# Altium PCB BuckLedDriver.PcbDoc
Units mm, origin at the board's own origin, x right, y up, seen from the top; angles counter-clockwise.
Board outline 21 x 16 mm, 2 copper layers (Top Layer, Bottom Layer); 22 components, 10 nets, 48 pads, 107 vias.
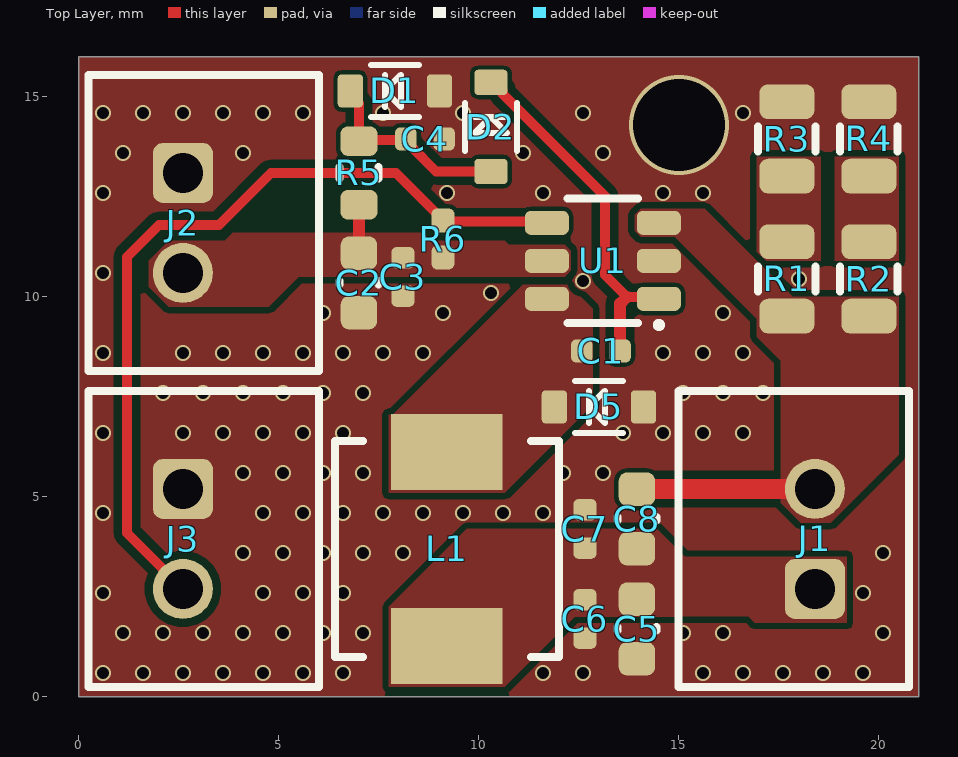
[diagram p0: Top Layer view]
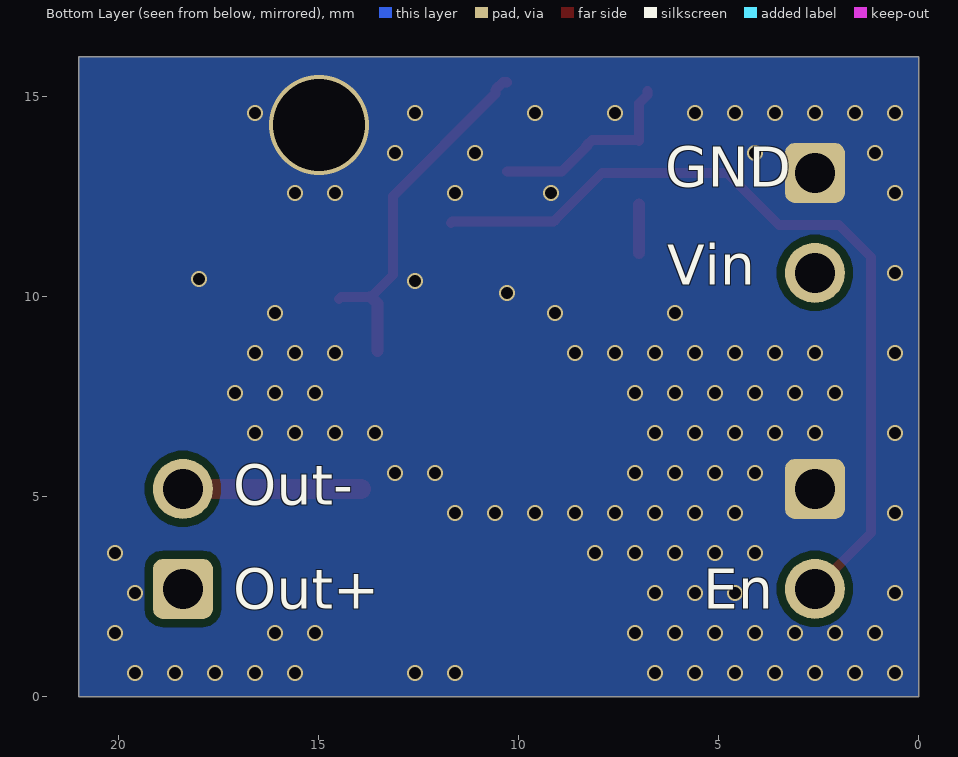
[diagram p1: Bottom Layer view, seen from below]
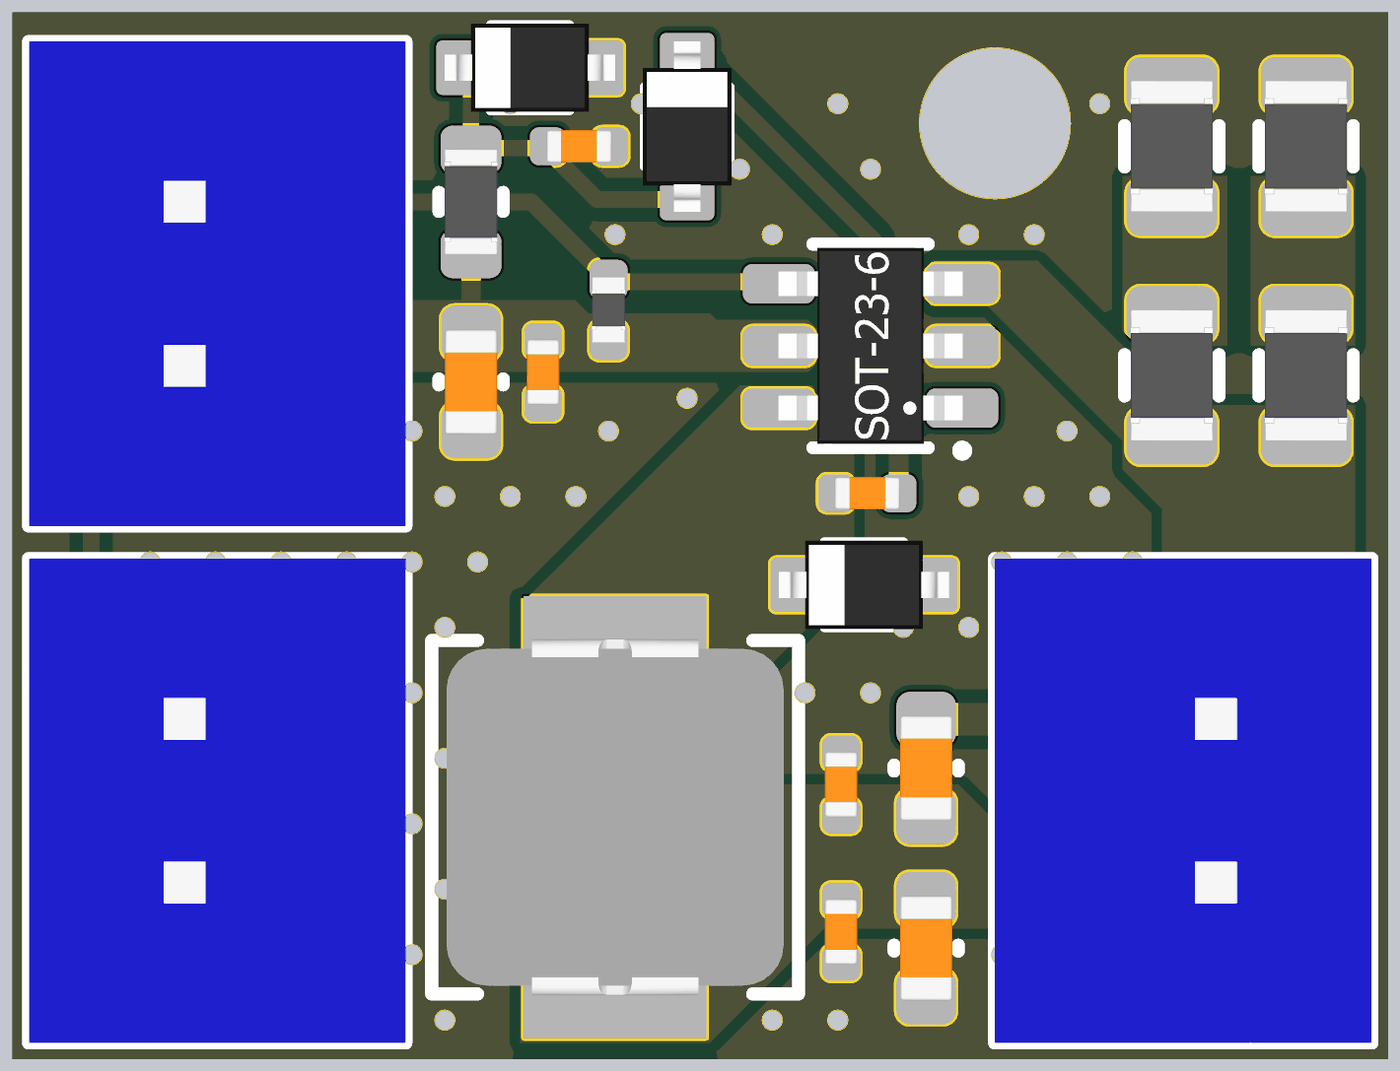
[diagram p2: 3D render of the assembled board from above, using the file's embedded part models]

## Layer stack, top to bottom
Top Solder: solder mask 0.0102, Solder Resist, Dk 3.5
Top Layer: signal copper 0.0356
Dielectric 1: dielectric 0.32, FR-4, Dk 4.8
Bottom Layer: signal copper 0.0356
Bottom Solder: solder mask 0.0102, Solder Resist, Dk 3.5

## Board outline
0,0 21,0 21,16 0,16

## Design rules (kind name [scope] priority, off if disabled: settings)
Clearance Clearance_1 [All] p1: gap=0.2 ignorepadtopadclearanceinfootprint=FALSE except(0: Arc-Hole Track-Hole SMDPad-Hole THPad-Hole Via-Hole Fill-Hole Poly-Hole Region-Hole Text-Hole; 0.1: Arc-Arc Arc-Track Arc-SMDPad Arc-THPad Track-Track Track-SMDPad Track-THPad SMDPad-Fill SMDPad-Poly SMDPad-Region; 0.12: SMDPad-SMDPad; 0.15: SMDPad-Via Fill-Fill Fill-Poly Fill-Region Poly-Poly Poly-Region Region-Region; 0.254: Arc-Text Track-Text SMDPad-THPad SMDPad-Text THPad-THPad THPad-Text Via-Text Fill-Text Poly-Text Region-Text Text-Text)
HoleSize [All] p1: absolutevalues=TRUE maxlimit=5 minlimit=0.025 maxpercent=80.000 minpercent=20.000
HoleToHoleClearance PadHoleClearance [IsPad] p1: gap=0.45 allowstackedmicrovias=TRUE
HoleToHoleClearance ViaHoleToHoleClearance [IsVia] p2: gap=0.2 allowstackedmicrovias=TRUE
MinimumSolderMaskSliver [All] p1: minsoldermaskwidth=0.13
PlaneClearance PlaneClearance_GNSS_RF [InNetClass('GNSS_RF')] p1: clearance=0.5
PlaneClearance [All] p2: clearance=0.2
PlaneConnect [All] p1: planeconnectstyle=Direct reliefexpansion=0.508 reliefentries=4 reliefconductorwidth=0.254 reliefairgap=0.254
PolygonConnect [All] p1: connectstyle=Direct reliefconductorwidth=0.254 reliefentries=4 polygonreliefangle="90 Angle" airgapwidth=0.254
RoutingCorners GNSS_RF_Corner [InNetClass('GNSS_RF')] p1: cornerstyle=Round minsetback=2.54 maxsetback=2.54
RoutingCorners GSM_RF_Corner [InNetClass('GSM_RF')] p2: cornerstyle=Round minsetback=2.54 maxsetback=2.54
RoutingCorners [All] p3: cornerstyle=Round minsetback=2.54 maxsetback=2.54
RoutingVias [All] p1: holewidth=0.25 width=0.35 viastyle="Through Hole" minholewidth=0.15 minwidth=0.25 maxholewidth=6.3 maxwidth=6.3
SilkToSilkClearance [All] p1: silktosilkclearance=0.15
SilkToSolderMaskClearance [IsPad] p1: minsilkscreentomaskgap=0.15 clearancetoexposedcopper=TRUE
SolderMaskExpansion [All] p1: expansion=0.038 istentingtop=FALSE
Width GNSS_RF [InNetClass('GNSS_RF')] p1: maxlimit=0.362 minlimit=0.361 preferedwidth=0.362 impedanceprofiledriven=TRUE impedanceprofileid={B57A2AE8-FEE7-4E6A-B57C-85C40F5AC8AD} minimp=50.000000 maximp=50.000000 favimp=50.000000
Width GSM_RF [InNetClass('GSM_RF')] p2: maxlimit=0.362 minlimit=0.361 preferedwidth=0.362 impedanceprofiledriven=TRUE impedanceprofileid={A0FC02F2-C9C1-43A3-96B0-B97EB0968512} minimp=50.000000 maximp=50.000000 favimp=50.000000
Width [All] p3: maxlimit=1 minlimit=0.1 preferedwidth=0.1 minimp=50.000000 maximp=50.000000 favimp=50.000000
22 further rules are at their usual default settings.

## Components (designator, comment, footprint, x,y, rotation, side; value= is the part's Value field where it differs from the comment)
C1 "10n" C0402_N 13.05,8.65 r180 top
C2 "10u" C0603_N 7,10.35 r90 top
C3 "100n" C0402_N 8.1,10.5 r90 top
C4 "100n" C0402_N 8.65,13.95 r180 top
C5 "10u" C0603_N 13.95,1.7 r90 top
C6 "1u" C0402_N 12.65,1.95 r90 top
C7 "100n" C0402_N 12.65,4.2 r270 top
C8 "1u" C0603_N 13.95,4.45 r270 top
D1 "4,7V" SOD-323 7.9,15.15 r0 top
D2 "DIODE" SOD-323 10.3,14.25 r270 top
D5 "DIODE" SOD-323 13,7.25 r0 top
J1 "" B2B-XH-A 18.4,2.7 r90 top
J2 "" B2B-XH-A 2.6,13.1 r270 top
J3 "" B2B-XH-A 2.6,5.2 r270 top
L1 "IND" IHLP2020 9.2,3.7 r270 top
R1 "RES" R0805_N 17.7,10.45 r90 top
R2 "RES" R0805_N 19.75,10.45 r90 top
R3 "RES" R0805_N 17.7,13.95 r90 top
R4 "RES" R0805_N 19.75,13.95 r90 top
R5 "2k" R0603_N 7,13.1 r90 top
R6 "RES" R0402_N 9.1,11.45 r90 top
U1 "LM3405" SOT23-6 13.1,10.9 r90 top

## Footprints (in the part's own frame and the unit in brackets; to place one, negate y for a bottom-side part, rotate by r counter-clockwise, add the part's x,y. Pads: shape width x height; smd on the part's side, far side on the other; paste and mask are expansions set on the pad)
B2B-XH-A [mm] "Header, Vertical, 2.50 mm pitch; 0.70 mm lead width, 5 pins, 1 row, 5 pins per row, 14.90 mm L X 5.75 mm W X 7.00 mm H body"
  rrect33% 1.5x1.5 / inner round 1.5 / far side rrect33% 1.5x1.5 hole 1 paste-1.5: 1(0,0)
  round 1.5 hole 1 paste-1.5: 2(2.5,0)
  silkscreen extent -2.45,-2.35 4.95,3.4, body extent -2.45,-2.35 4.95,3.4, height 7.05
C0402_N [mm] "Capacitor, Chip; 1.00 mm L X 0.50 mm W X 0.55 mm H body"
  rrect52% 0.54x0.58 smd: 1(-0.48,0) 2(0.48,0)
  body extent -0.5,-0.25 0.5,0.25, height 0.55
C0603_N [mm] "Capacitor, Chip; 1.60 mm L X 0.80 mm W X 0.87 mm H body"
  rrect50% 0.84x0.91 smd: 1(-0.745,0) 2(0.745,0)
  silkscreen extent -0.05,-0.49 0.05,0.49, body extent -0.8,-0.4 0.8,0.4, height 0.87
IHLP2020 [mm] "Inductor, 5.18mm L X 5.18mm W X 3 mm H body"
  rect 1.905x2.79 smd: 1(-2.425,0) 2(2.425,0)
  silkscreen extent -2.7,-2.8 2.7,2.8, body extent -2.73,-2.57 2.73,2.57, height 2.84
R0402_N [mm] "Resistor, Chip; 1.00 mm L X 0.50 mm W X 0.40 mm H body"
  rrect52% 0.6x0.58 smd: 1(-0.465,0) 2(0.465,0)
  body extent -0.5,-0.25 0.5,0.25, height 0.4
R0603_N [mm] "Resistor, Chip; 1.60 mm L X 0.80 mm W X 0.55 mm H body"
  rrect51% 0.74x0.93 smd: 1(-0.795,0) 2(0.795,0)
  silkscreen extent -0.15,-0.49 0.15,0.49, body extent -0.8,-0.4 0.8,0.4, height 0.55
R0805_N [mm] "Resistor, Chip; 2.00 mm L X 1.25 mm W X 0.60 mm H body"
  rrect51% 0.87x1.38 smd: 1(-0.93,0) 2(0.93,0)
  silkscreen extent -0.32,-0.72 0.32,0.72, body extent -1,-0.63 1,0.63, height 0.6
SOD-323 [mm] "SOD-323"
  rrect30% 0.63x0.83 smd: A(1.115,0) C(-1.115,0)
  silkscreen extent -0.6,-0.65 0.6,0.65, body extent -1.3,-0.67 1.3,0.68, height 1.1
SOT23-6 [mm] "Small Outline Transistor (SOT23), 0.95 mm pitch; 6 pin"
  rrect49% 0.6x1.1 smd: 1(-0.95,-1.4) 2(0,-1.4) 3(0.95,-1.4) 4(0.95,1.4) 5(0,1.4) 6(-0.95,1.4)
  silkscreen extent -1.68,-1.48 1.56,0.88, body extent -1.5,-1.4 1.5,1.4, height 0.86

## Part data
C1 C2 C3 C4 C5 C6 C7 C8: library part CAP, RevS="$Rev:: 58        $"
D1: library part DIODE_ZENER
J1 J2 J3: library part PINHDR_2X1, "Socket", ComponentLink1Description=Manufacturer, ComponentLink1URL=http://www.we-online.de, ComponentLink2Description=Datasheet, ComponentLink2URL=http://katalog.we-online.de/em/datasheet/691412320002.pdf
L1: "Inductor"
R5: library part RES
U1: "1.6-MHz, 1-A Constant Current Buck LED Driver"

## Via types
v1: diameter 0.4, hole 0.3, Top Layer to Bottom Layer, tented both sides, 106 vias
v2: diameter 2.5, hole 2.3, Top Layer to Bottom Layer, tented both sides, 1 vias

## Nets (pads, with @x,y where several pads share a name; then routed paths per layer and width w, separated by ;. In a path a pad name is that pad's centre, name@x,y a point inside that pad or via, vN(x,y) a via of type N, cw(c..) or ccw(c..) an arc to the next point about the centre after c; other vN are vias at no path point)
EN: J3.2 R6.2 U1.4 | length 20.8
  Top Layer w0.254: J3.2 1.2,4.1 1.2,11 2,11.8 3.5,11.8 4.8,13.1 7.925,13.1 9.1,11.925 R6.2 9.132,11.883 11.668,11.883 U1.4
GND: C2.1 C3.1 C4.1 C5.1 C6.1 C7.1 D1.A D5.A J2.1 J3.1 R3.2 R4.2 U1.2
  other v1: 0.6,0.6 1.6,0.6 2.6,0.6 3.6,0.6 4.6,0.6 5.6,0.6 6.6,0.6 11.6,0.6 12.6,0.6 15.6,0.6 16.6,0.6 17.6,0.6 18.6,0.6 19.6,0.6 1.1,1.6 2.1,1.6 3.1,1.6 4.1,1.6 5.1,1.6 6.1,1.6 7.1,1.6 15.1,1.6 16.1,1.6 20.1,1.6 0.6,2.6 4.6,2.6 5.6,2.6 6.6,2.6 19.6,2.6 4.1,3.6 5.1,3.6 6.1,3.6 7.1,3.6 8.1,3.6 20.1,3.6 0.6,4.6 4.6,4.6 5.6,4.6 6.6,4.6 7.6,4.6 8.6,4.6 9.6,4.6 10.6,4.6 11.6,4.6 4.1,5.6 5.1,5.6 6.1,5.6 7.1,5.6 12.1,5.6 13.1,5.6 0.6,6.6 2.6,6.6 3.6,6.6 4.6,6.6 5.6,6.6 6.6,6.6 13.6,6.6 14.6,6.6 15.6,6.6 16.6,6.6 2.1,7.6 3.1,7.6 4.1,7.6 5.1,7.6 6.1,7.6 7.1,7.6 15.1,7.6 16.1,7.6 17.1,7.6 0.6,8.6 2.6,8.6 3.6,8.6 4.6,8.6 5.6,8.6 6.6,8.6 7.6,8.6 8.6,8.6 14.6,8.6 15.6,8.6 16.6,8.6 6.1,9.6 9.1,9.6 16.1,9.6 10.3,10.1 12.6,10.4 18,10.45 0.6,10.6 0.6,12.6 9.2,12.6 11.6,12.6 14.6,12.6 15.6,12.6 1.1,13.6 4.1,13.6 11.1,13.6 13.1,13.6 0.6,14.6 1.6,14.6 2.6,14.6 3.6,14.6 4.6,14.6 5.6,14.6 7.6,14.6 9.6,14.6 12.6,14.6 16.6,14.6
  other v2: 15,14.3
NetC1_1: C1.1 D2.C U1.1 | length 9.1
  Top Layer w0.254: D2.C 10.4,15.365 10.588,15.177 10.588,15.077 13.15,12.515 13.15,10.55 13.7,10 14.45,10 U1.1
  Top Layer w0.3: C1.1 13.53,9.83 13.7,10
NetC1_2: C1.2 D5.C L1.1 U1.6
NetC4_2: C4.2 D1.C D2.A R5.2 | length 5
  Top Layer w0.254: D1.C 6.785,15.05 7,14.835 R5.2 7.028,13.922 8.17,13.922 8.305,13.788 8.305,13.759 8.928,13.135 D2.A
NetR1_2: R1.2 R3.1
NetR2_2: R2.2 R4.1
Out+: C5.2 C6.2 C7.2 C8.2 J1.1 L1.2
Out-: C8.1 J1.2 R1.1 R2.1 U1.3 | length 4.5
  Top Layer w0.5: C8.1 13.952,5.198 18.397,5.198 J1.2
Vin: C2.2 C3.2 J2.2 R5.1 R6.1 U1.5 | length 1.2
  Top Layer w0.3: C2.2 R5.1

## Polygon pours and split planes (outlines as drawn)
Out- on Top Layer "OUT-_L01_P001" (solid, pour order 1): 13.9,11.65 14.05,11.5 14.9,11.5 16.95,9.45 16.95,9.007 17.55,8.407 17.55,4.85 18.05,4.35 18.8,4.35 19.25,4.8 20.5,6.05 20.5,10 17.85,10 15.65,12.2 14.05,12.2 13.9,12.05
GND on Top Layer "GND_L01_P006" (solid, remove dead copper, pour order 6): 21,16 21,0 0,0 0,16
Out+ on Top Layer "OUT+_L01_P005" (solid, pour order 5): 7.75,0.25 10.65,0.25 12.4,2 16.75,2 16.9,1.85 19.2,1.85 19.2,3.5 15.15,3.5 14.45,4.2 9.7,4.2 7.75,2.25
NetC1_2 on Top Layer "NETC1_2_L01_P004" (solid, pour order 4): 11.1,10.3 12.25,10.3 12.85,9.7 12.85,7.3 10.65,5.1 7.75,5.1 7.75,7.05 7.85,7.05
NetR2_2 on Top Layer "NETR2_2_L01_P003" (solid, pour order 3): 20.5,13.5 20.5,10.9 18.9,10.9 18.9,13.5
NetR1_2 on Top Layer "NETR1_2_L01_P002" (solid, pour order 2): 16.95,13.5 18.55,13.5 18.55,10.9 16.95,10.9
Vin on Top Layer "VIN_L01_P000" (solid, pour order 0): 2.25,11.4 1.75,10.9 1.75,10.25 2.25,9.75 4.75,9.75 5.5,10.5 12.15,10.5 12.3,10.65 12.3,11.15 12.15,11.3 10.75,11.3 10.65,11.4 8.8,11.4 8.6,11.6 3.85,11.6 3.65,11.4
GND on Bottom Layer "GND_L02_P007" (solid, pour order 7): 21,16 21,0 0,0 0,16

## Silkscreen, mask and mechanical layers (free items; w line width, h text height)
Bottom Overlay:
  text "GND" at 6.346,12.754 h1
  text "Vin" at 6.296,10.304 h1
  text "Out-" at 17.146,4.804 h1
  text "En" at 5.396,2.204 h1
  text "Out+" at 17.146,2.204 h1
Mechanical 1:
  the board outline again, w0.254